# Altium PCB PCB.PcbDoc
Units mil, origin at the board's own origin, x right, y up, seen from the top; angles counter-clockwise.
Board outline 630 x 510 mil, 2 copper layers (Top Layer, Bottom Layer); 3 components, 4 nets, 10 pads, 0 vias.
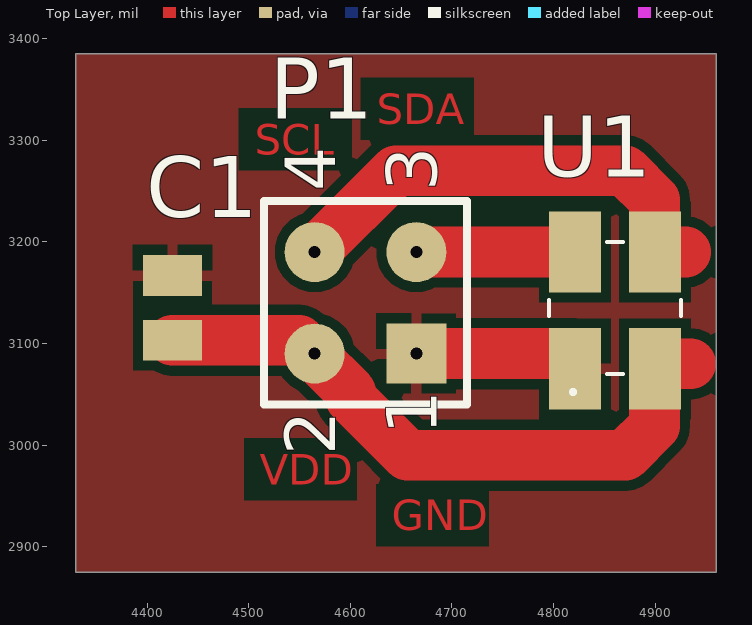
[diagram p0: Top Layer view]
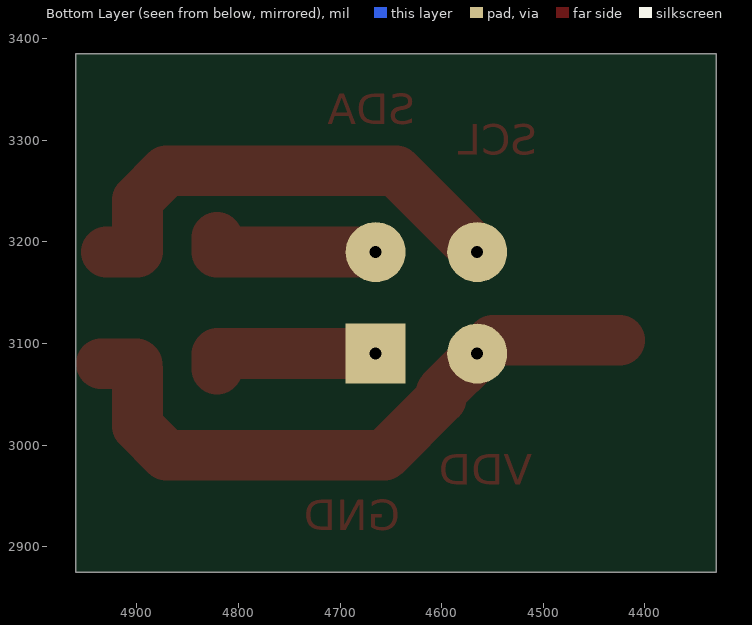
[diagram p1: Bottom Layer view, seen from below]

## Layer stack, top to bottom
Top Solder: solder mask 0.4, Solder Resist, Dk 3.5
Top Layer: signal copper 1.4
Dielectric 1: dielectric 12.6, FR-4, Dk 4.8
Bottom Layer: signal copper 1.4
Bottom Solder: solder mask 0.4, Solder Resist, Dk 3.5

## Board outline
4330,2875 4960,2875 4960,3385 4330,3385

## Design rules (kind name [scope] priority, off if disabled: settings)
Clearance [All] p1: gap=10 ignorepadtopadclearanceinfootprint=FALSE except(0: Arc-Hole Track-Hole SMDPad-Hole THPad-Hole Via-Hole Fill-Hole Poly-Hole Region-Hole Text-Hole)
PolygonConnect [All] p1: connectstyle=Relief reliefconductorwidth=10 reliefentries=4 polygonreliefangle="90 Angle" airgapwidth=10
RoutingVias [All] p1: holewidth=28 width=50 viastyle="Through Hole" minholewidth=28 minwidth=50 maxholewidth=28 maxwidth=50
SolderMaskExpansion [All] p1: expansion=4 istentingtop=FALSE
Width [All] p1: maxlimit=100 minlimit=10 preferedwidth=10 bottomlayer_maxwidth=10 minimp=50.000000 maximp=50.000000 favimp=50.000000
30 further rules are at their usual default settings.

## Components (designator, comment, footprint, x,y, rotation, side; value= is the part's Value field where it differs from the comment)
C1 "100nF" CAPC2012X94N 4425,3135 r270 top
P1 "Header 2X2" HDR2X2 4665,3090 r90 top
U1 "MS583702BA21-50" MS583702BA0150 4860.63,3135 r90 top

## Footprints (in the part's own frame and the unit in brackets; to place one, negate y for a bottom-side part, rotate by r counter-clockwise, add the part's x,y. Pads: shape width x height; smd on the part's side, far side on the other; paste and mask are expansions set on the pad)
CAPC2012X94N [mm]
  rect 1.02x1.47 smd: 1(-0.81,0) 2(0.81,0)
  body extent -1,-0.63 1,0.63, height 0.94
HDR2X2 [mm] "Connector; Header; 2x2 Position"
  rect 1.5x1.5 hole 0.3: 1(0,0)
  round 1.5 hole 0.3: 2(0,2.54) 3(2.54,0) 4(2.54,2.54)
  silkscreen extent -1.27,-1.27 3.81,3.81
MS583702BA0150 [mil]
  rect 80x51.18 smd: 1(-60,39.37) 2(-60,-39.37) 3(55,-39.37) 4(55,39.37)
  silkscreen extent -85,-65 65,65, body extent -65,-65 65,65

## Part data
C1: library part 08055A130JAT2A, "Capacitor", Manufacturer_Name=AVX, Mouser Part Number=581-08055A130JAT2A, Datasheet Link=https://componentsearchengine.com/Datasheets/1/06031A100FAT2A.pdf, Height=0.94mm, Manufacturer_Part_Number=08055A130JAT2A, Mouser Price/Stock=https://www.mouser.com/Search/Refine.aspx?Keyword=581-08055A130JAT2A
P1: "Header, 2-Pin, Dual row", LatestRevisionDate=17-Jul-2002, LatestRevisionNote="Re-released for DXP Platform.", Publisher="Altium Limited"
U1: "Undefined or Miscellaneous", Manufacturer_Name="TE Connectivity", Mouser Part Number=824-MS583702BA21-50, Arrow Part Number=MS583702BA21-50, Arrow Price/Stock=https://www.arrow.com/en/products/ms583702ba21-50/te-connectivity, Datasheet Link=http://www.farnell.com/datasheets/2646146.pdf, Height=2.75mm, Manufacturer_Part_Number=MS583702BA21-50, Mouser Price/Stock=https://www.mouser.co.uk/ProductDetail/Measurement-Specialties/MS583702BA21-50/?qs=wd5RIQLrsJg6rRsxw5mX6w%3D%3D

## Nets (pads, with @x,y where several pads share a name; then routed paths per layer and width w, separated by ;. In a path a pad name is that pad's centre, name@x,y a point inside that pad or via, vN(x,y) a via of type N, cw(c..) or ccw(c..) an arc to the next point about the centre after c; other vN are vias at no path point)
GND: C1.1 P1.1 U1.1 | length 170.9
  Top Layer w50: P1.1 4820.67,3090 4821.26,3089.41 U1.1
NetC1_2: C1.2 P1.2 U1.2 | length 634.4
  Top Layer w50: C1.2 4549.44,3103.11 4562.55,3090 P1.2 4565,3087.55 4600.47,3052.08 4600.47,3045.97 4656.45,2990 4870.71,2990 4899.41,3018.7 4899.41,3074.41 U1.2 4900,3079.41 4900.59,3080 4935,3080
NetP1_3: P1.3 U1.4 | length 170.7
  Top Layer w50: P1.3 U1.4 U1.4@4821.26,3204.41
NetP1_4: P1.4 U1.3 | length 463.4
  Top Layer w50: P1.4@4567.45,3190 P1.4 4645,3270 4870.71,3270 4899.41,3241.3 4899.41,3190.59 U1.3 4930,3190

## Polygon pours and split planes (outlines as drawn)
GND on Top Layer "GND_L01_P000" (solid, pour order 0): 4330,3385 4960,3385 4960,2875 4330,2875

## Other copper
Top Layer:
  text "SDA" at 4626,3316 h30
  text "SCL" at 4506,3286 h30
  text "VDD" at 4511,2961 h30
  text "GND" at 4641,2916 h30

## Text inside footprints (layer, text, board x,y; h text height)
P1: Top Overlay "1" at 4685,3010 h50 r90; Top Overlay "2" at 4585,2990 h50 r90; Top Overlay "4" at 4585,3250 h50 r90; Top Overlay "3" at 4685,3250 h50 r90